# Altium PCB PCB2_DEMO_BOARD.PcbDoc (part 2 of 2)
Units mm, origin at the board's own origin, x right, y up, seen from the top; angles counter-clockwise.
Board outline 60.62 x 54.58 mm, 4 copper layers (Top Layer, GND, POWER, Bottom Layer), stack 0.778 mm thick; 141 components, 123 nets, 491 pads, 190 vias.
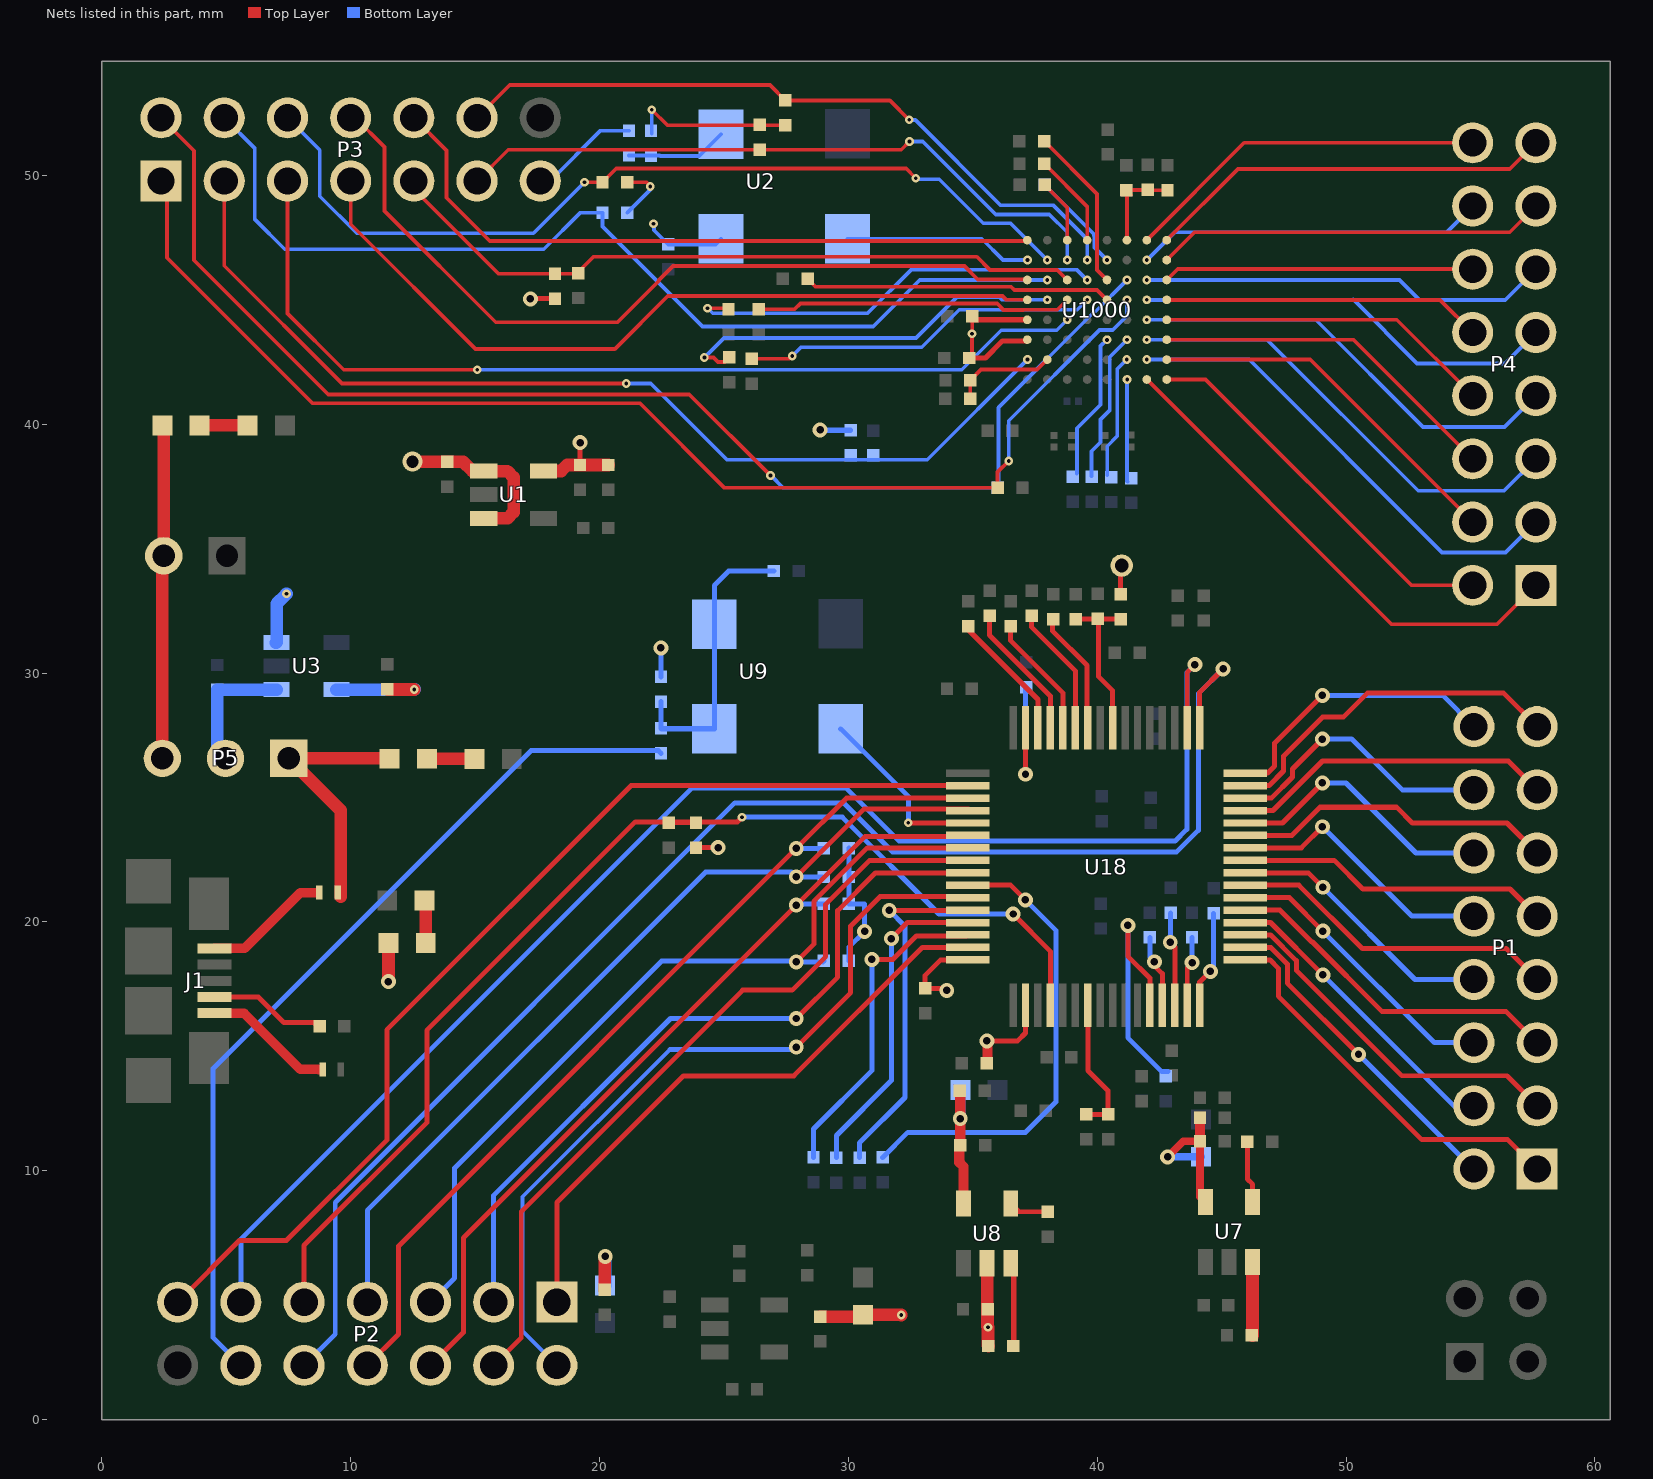
[diagram p4: the nets of this part, all layers, seen from the top]

## Via types
v1: diameter 0.6, hole 0.3, Top Layer to Bottom Layer, tented both sides, 112 vias
v2: diameter 0.35, hole 0.15, Top Layer to Bottom Layer, tented both sides, 75 vias
v3: diameter 0.8, hole 0.5, Top Layer to Bottom Layer, tented both sides, 3 vias

## Nets (pads, with @x,y where several pads share a name; then routed paths per layer and width w, separated by ;. In a path a pad name is that pad's centre, name@x,y a point inside that pad or via, vN(x,y) a via of type N, cw(c..) or ccw(c..) an arc to the next point about the centre after c; other vN are vias at no path point) (continued)
NetC23_1: C23.1 C24.1 L3.1 U7.5 | length 6.4
  Top Layer w0.305: v1(42.829,10.56) 43.457,11.188 C23.1@44.127,11.188 44.127,10.244 44.127,8.957 U7.5@44.346,8.738
  Top Layer w0.406: C23.1@44.127,11.188 C24.1@44.127,12.121
  Bottom Layer w0.305: v1(42.829,10.56) 44.171,10.56 L3.1@44.174,10.562
NetC27_1: C27.1 U7.4 | length 2.5
  Top Layer w0.2: C27.1@46.03,11.167 46.03,10.225 46.03,9.67 46.246,9.454 U7.4@46.246,8.738
NetC29_1: C29.1 C30.1 L4.1 U8.5 | length 5.8
  Top Layer w0.406: C29.1@34.476,13.216 34.495,13.198 v1(34.495,12.095) C30.1@34.495,11.026 34.452,10.983 34.452,10.341 34.622,10.171 U8.5@34.622,8.683
  Bottom Layer w0.406: v1(34.495,12.095) 34.495,13.247 L4.1@34.496,13.248
NetC32_1: C32.1 R1002.2 R1003.2 U9.1 U9.4 | length 11.6
  Bottom Layer w0.203: R1002.2@22.468,28.849 R1003.2@22.468,27.773 22.481,27.76 U9.4@24.61,27.76 U9.1@24.61,31.96 24.61,33.518 25.192,34.1 C32.1@27.004,34.1
NetC33_1: C33.1 U8.4 | length 1.6
  Top Layer w0.2: U8.4@36.53,8.691 U8.4@36.522,8.683 36.854,8.351 C33.1@38.006,8.351 38.014,8.343 C33.1@38.017,8.343
NetC34_2: C34.2 U1000.H6 | length 2.6
  Top Layer w0.15: C34.2@37.882,49.622 38.792,48.712 U1000.H6@38.792,47.395
NetC35_2: C35.2 C36.2 R30.2 U1000.H3 | length 3.9
  Top Layer w0.15: U1000.H3@41.192,47.395 C35.2@41.192,49.406 ; C35.2@41.361,49.218 C35.2@41.173,49.406 42.012,49.406 42.019,49.399 R30.2@42.822,49.399
NetC37_2: C37.2 C38.2 U1000.B7 | length 4.2
  Top Layer w0.15: C37.2@34.896,41.024 34.9,41.028 C38.2@34.9,41.768 35.327,42.195 37.592,42.195 U1000.B7@37.992,42.595
NetC39_2: C39.2 U1000.H5 | length 3.8
  Top Layer w0.15: C39.2@37.876,50.467 39.592,48.751 U1000.H5@39.592,47.395
NetC76_2: C76.2 U18.64 | length 3.9
  Top Layer w0.2: U18.64@44.116,16.648 44.116,17.587 v1(44.543,18.014)
  Bottom Layer w0.2: v1(44.543,18.014) 44.675,18.145 C76.2@44.675,20.345
NetC77_2: C77.2 C78.2 R84.2 U18.24 | length 6.3
  Top Layer w0.2: C77.2@39.13,32.164 C78.2@40.01,32.164 ; C78.2@40.023,32.178 R84.2@40.918,32.178 ; C78.2@40.041,32.088 40.041,29.864 40.616,29.289 U18.24@40.616,27.798
NetC79_2: C79.2 U18.26 | length 5.1
  Top Layer w0.2: C79.2@38.208,32.306 38.208,31.685 39.584,30.309 39.584,27.83 U18.26@39.616,27.798
NetC80_2: C80.2 U18.30 | length 5.4
  Top Layer w0.2: C80.2@34.842,32.033 34.842,31.709 37.616,28.935 U18.30@37.616,27.798
NetC81_2: C81.2 C82.2 U18.55 | length 5.6
  Top Layer w0.2: C82.2@39.549,12.265 40.43,12.265 40.43,13.218 39.626,14.023 39.626,16.639 U18.55@39.616,16.648
NetC83_2: C83.2 U18.28 | length 4.7
  Top Layer w0.2: 36.518,31.633 36.518,31.303 38.616,29.204 U18.28@38.616,27.798
NetD1_2: D1.2 R20.2 | length 1.7
  Top Layer w0.508: R20.2@12.968,20.851 13.016,20.803 D1.2@13.016,19.146
NetD2_2: D2.2 R22.2 | length 1.9
  Top Layer w0.508: D2.2@13.059,26.555 14.955,26.555 R22.2@14.972,26.539
NetD3_1: D3.1 P5.3 P6.2 | length 13.4
  Top Layer w0.508: P5.3@2.429,26.569 P6.2@2.429,34.711 ; D3.1@2.431,39.949 2.487,39.894 P6.2@2.487,34.711
NetD3_2: D3.2 R27.2 | length 1.9
  Top Layer w0.508: D3.2@3.931,39.949 5.85,39.949 R27.2@5.859,39.94
NetJ1_1: J1.1 U10.2 | length 5
  Top Layer w0.381: J1.1@4.525,18.93 5.733,18.93 7.98,21.178 8.607,21.178
NetJ1_4: J1.4 R28.2 | length 4.7
  Top Layer w0.2: J1.4@4.525,16.98 6.287,16.98 7.314,15.953 8.513,15.953 R28.2@8.741,15.725
NetJ1_5: J1.5 U12.2 | length 5.3
  Top Layer w0.2: 8.713,14.065 U12.2@8.869,14.065
  Top Layer w0.381: J1.5@4.525,16.33 5.715,16.33 7.971,14.074 8.703,14.074 8.713,14.065
NetP1_1: P1.1 U18.1 | length 15.9
  Top Layer w0.2: U18.1@45.941,18.473 46.94,18.473 47.279,18.135 47.279,17.016 53.045,11.249 56.493,11.249 P1.1@57.675,10.067
NetP1_2: P1.2 U18.2 | length 13.3
  Top Layer w0.2: U18.2@45.941,18.973 46.972,18.973 47.64,18.305 47.64,17.535 v1(50.497,14.678)
  Bottom Layer w0.2: v1(50.497,14.678) 55.107,10.067 P1.2@55.135,10.067
NetP1_3: P1.3 U18.3 | length 14.8
  Top Layer w0.2: U18.3@45.941,19.473 46.967,19.473 48.001,18.439 48.001,18.054 52.239,13.816 56.466,13.816 P1.3@57.675,12.607
NetP1_4: P1.4 U18.4 | length 12.2
  Top Layer w0.2: U18.4@45.941,19.973 46.962,19.973 v1(49.066,17.869)
  Bottom Layer w0.2: v1(49.066,17.869) 54.328,12.607 P1.4@55.135,12.607
NetP1_5: P1.5 U18.5 | length 13.9
  Top Layer w0.2: U18.5@45.941,20.473 47.342,20.473 48.625,19.19 48.65,19.19 51.435,16.406 56.416,16.406 P1.5@57.675,15.147
NetP1_6: P1.6 U18.6 | length 11.6
  Top Layer w0.2: U18.6@45.941,20.973 47.723,20.973 v1(49.066,19.629)
  Bottom Layer w0.2: v1(49.066,19.629) 53.549,15.147 P1.6@55.135,15.147
NetP1_7: P1.7 U18.7 | length 13.3
  Top Layer w0.2: U18.7@45.941,21.473 48.103,21.473 50.648,18.929 56.434,18.929 P1.7@57.675,17.687
NetP1_8: P1.8 U18.8 | length 11
  Top Layer w0.2: U18.8@45.941,21.973 48.483,21.973 v1(49.066,21.39)
  Bottom Layer w0.2: v1(49.066,21.39) 52.769,17.687 P1.8@55.135,17.687
NetP1_9: P1.9 U18.9 | length 12.7
  Top Layer w0.2: U18.9@45.941,22.473 49.519,22.473 50.673,21.319 56.583,21.319 P1.9@57.675,20.227
NetP1_10: P1.10 U18.10 | length 11.1
  Top Layer w0.2: U18.10@45.996,23.029 U18.10@45.941,22.973 48.199,22.973 v1(49.049,23.823)
  Bottom Layer w0.2: v1(49.049,23.823) 52.645,20.227 P1.10@55.135,20.227
NetP1_11: P1.11 U18.11 | length 13
  Top Layer w0.203: U18.11@45.941,23.473 47.819,23.473 48.96,24.614 48.968,24.605 52.031,24.605 52.662,23.975 56.468,23.975 P1.11@57.675,22.767
NetP1_12: P1.12 U18.12 | length 11
  Top Layer w0.203: U18.12@45.941,23.973 47.439,23.973 v1(49.049,25.584)
  Bottom Layer w0.203: v1(49.049,25.584) 49.991,25.584 52.807,22.767 P1.12@55.135,22.767
NetP1_13: P1.13 U18.13 | length 13
  Top Layer w0.203: U18.13@45.941,24.473 47.058,24.473 49.049,26.464 56.518,26.464 P1.13@57.675,25.307
NetP1_14: P1.14 U18.14 | length 11.2
  Top Layer w0.203: U18.14@45.941,24.973 46.997,24.973 47.846,25.823 47.846,26.141 v1(49.049,27.344)
  Bottom Layer w0.203: v1(49.049,27.344) 50.222,27.344 52.259,25.307 P1.14@55.135,25.307
NetP1_15: P1.15 U18.15 | length 14.2
  Top Layer w0.203: U18.15@45.941,25.473 46.898,25.473 47.485,26.06 47.485,26.66 49.049,28.225 49.886,28.225 50.864,29.203 56.319,29.203 P1.15@57.675,27.847
NetP1_16: P1.16 U18.16 | length 11.6
  Top Layer w0.2: U18.16@45.941,25.973 46.84,25.973 47.124,26.257 47.124,27.18 v1(49.049,29.105)
  Bottom Layer w0.2: v1(49.049,29.105) 53.877,29.105 P1.16@55.135,27.847
NetP2_1: P2.1 U18.47 | length 24.9
  Top Layer w0.2: P2.1@18.286,4.718 18.286,8.726 23.371,13.811 27.805,13.811 32.967,18.973 U18.47@34.885,18.973
NetP2_2: P2.2 U18.43 | length 31.9
  Top Layer w0.2: v1(27.904,14.964) 30.092,17.152 30.092,19.833 31.272,21.013 34.845,21.013 U18.43@34.885,20.973
  Bottom Layer w0.152: P2.2@18.286,2.178 16.901,3.563 16.901,8.953 22.824,14.876
  Bottom Layer w0.2: 22.824,14.876 27.815,14.876 v1(27.904,14.964)
NetP2_3: P2.3 U18.41 | length 30.4
  Top Layer w0.2: v1(27.904,16.117) 29.567,17.78 29.567,20.452 31.088,21.973 U18.41@34.885,21.973
  Bottom Layer w0.2: P2.3@15.746,4.718 15.746,9.014 22.849,16.117 v1(27.904,16.117)
NetP2_4: P2.4 U18.40 | length 31.7
  Top Layer w0.2: P2.4@15.746,2.178 16.853,3.285 16.853,8.357 25.752,17.256 27.738,17.256 29.084,18.602 29.084,20.703 30.855,22.473 U18.40@34.885,22.473
NetP2_5: P2.5 R79.1 U18.39 | length 33.9
  Top Layer w0.2: v1(27.904,18.395) 28.611,19.102 28.611,20.827 30.757,22.973 U18.39@34.885,22.973
  Bottom Layer w0.2: P2.5@13.206,4.718 14.179,5.691 14.179,10.111 22.495,18.427 v1@27.871,18.427 ; v1(27.904,18.395) 28.982,18.395 R79.1@29.017,18.43
NetP2_6: P2.6 R81.2 U18.38 | length 33.8
  Top Layer w0.2: P2.6@13.206,2.178 14.532,3.505 14.532,7.302 v1(27.904,20.674) 30.657,23.427 34.839,23.427 U18.38@34.885,23.473
  Bottom Layer w0.2: v1@27.953,20.723 R81.2@29.017,20.723
NetP2_7: P2.7 R82.1 U18.36 | length 35.9
  Top Layer w0.2: v1(27.904,21.813) 30.618,24.527 34.832,24.527 U18.36@34.885,24.473
  Bottom Layer w0.2: P2.7@10.666,4.718 10.666,8.406 24.262,22.002 27.715,22.002 v1(27.904,21.813) ; v1@27.914,21.803 R82.1@29.017,21.803
NetP2_8: P2.8 R83.1 U18.35 | length 36.8
  Top Layer w0.2: P2.8@10.666,2.178 11.924,3.436 11.924,6.972 v1(27.904,22.952) 29.925,24.973 U18.35@34.885,24.973
  Bottom Layer w0.2: v1(27.904,22.952) R83.1@29.002,22.952
NetP2_9: P2.9 R78.1 R80.2 U18.52 | length 47.1
  Top Layer w0.2: P2.9@8.126,4.718 8.126,6.999 13.058,11.931 13.058,15.644 21.436,24.022 25.539,24.022 v2(25.723,24.205) ; R80.2@22.786,23.983 R78.1@23.874,23.983 ; v1(36.618,20.317) 38.116,18.819 U18.52@38.116,16.648
  Bottom Layer w0.2: v2(25.723,24.205) 29.753,24.205 33.642,20.317 v1(36.618,20.317)
NetP2_10: P2.10 U18.17 | length 59.3
  Top Layer w0.2: U18.17@44.116,27.798 44.116,29.224 v1(45.055,30.163)
  Bottom Layer w0.2: P2.10@8.126,2.178 9.378,3.431 9.378,8.725 25.439,24.786 29.802,24.786 31.774,22.814 43.192,22.814 44.06,23.681 44.06,29.168 v1(45.055,30.163) v1@44.98,30.163
NetP2_11: P2.11 U18.18 | length 58.6
  Top Layer w0.2: U18.18@43.616,27.798 43.616,30.03 v1(43.92,30.334)
  Bottom Layer w0.2: P2.11@5.586,4.718 5.586,7.248 23.723,25.385 29.894,25.385 32.036,23.243 43.126,23.243 43.6,23.716 43.6,30.014 v1(43.92,30.334)
NetP2_12: P2.12 R1003.1 | length 35.7
  Bottom Layer w0.2: P2.12@5.586,2.178 4.473,3.291 4.473,14.108 17.243,26.878 22.363,26.878 R1003.1@22.468,26.773
NetP2_13: P2.13 U18.34 | length 43
  Top Layer w0.2: P2.13@3.046,4.718 5.521,7.194 7.416,7.194 11.449,11.227 11.449,15.66 21.262,25.473 U18.34@34.791,25.473 U18.34@34.885,25.473
NetP3_1: P3.1 R10.1 U1000.E3 | length 50.4
  Top Layer w0.15: P3.1@2.377,49.772 2.618,49.531 2.618,46.685 8.463,40.84 21.625,40.84 25.024,37.441 R10.1@35.995,37.441 35.995,38.077 v2(36.441,38.523)
  Bottom Layer w0.15: v2(36.441,38.523) 36.441,40.135 40.092,43.786 40.625,43.786 41.192,44.354 v2(41.192,44.995)
NetP3_2: P3.2 R11.1 U1000.F3 | length 52.9
  Top Layer w0.15: P3.2@2.377,52.312 3.704,50.986 3.704,46.588 9.096,41.196 23.607,41.196 v2(26.866,37.936) ; U1000.F3@41.192,45.795 v2(41.193,45.796)
  Bottom Layer w0.15: v2(26.866,37.936) 26.887,37.936 27.383,37.441 R11.1@35.995,37.441 36.026,37.472 36.026,40.665 39.901,44.539 39.936,44.539 v2(41.193,45.796)
NetP3_3: P3.3 R4.1 R8.2 U1000.B8 | length 40.6
  Top Layer w0.15: P3.3@4.917,49.772 4.917,46.364 9.644,41.637 v2(21.072,41.637)
  Bottom Layer w0.15: v2(21.072,41.637) 22.054,41.637 25.122,38.569 33.166,38.569 v2(37.192,42.595)
NetP3_4: P3.4 R3.2 U1000.F7 | length 40.5
  Bottom Layer w0.15: P3.4@4.917,52.312 6.148,51.081 6.148,48.225 7.347,47.027 17.761,47.027 19.234,48.5 R3.2@20.117,48.5 20.117,47.941 24.131,43.928 30.996,43.928 32.864,45.795 v2(37.992,45.795)
NetP3_5: P3.5 U1000.D6 | length 38.4
  Top Layer w0.15: P3.5@7.457,49.772 7.457,44.449 9.72,42.187 v2(15.082,42.187)
  Bottom Layer w0.15: v2(15.082,42.187) 34.555,42.187 36.142,43.774 38.371,43.774 v2(38.792,44.195)
NetP3_6: P3.6 R12.2 U1000.G7 | length 36.2
  Top Layer w0.15: v2(19.394,49.722) 19.39,49.717 R12.2@20.118,49.717 20.672,50.272 32.321,50.272 v2(32.709,49.884)
  Bottom Layer w0.15: P3.6@7.457,52.312 8.758,51.012 8.758,49.158 10.248,47.668 17.34,47.668 v2(19.394,49.722) ; v2(32.709,49.884) 32.754,49.839 33.654,49.839 35.419,48.073 36.514,48.073 37.986,46.601 v2(37.992,46.601)
NetP3_7: P3.7 U1000.E8 | length 32
  Top Layer w0.15: P3.7@9.997,49.772 9.997,48.037 15.013,43.022 20.615,43.022 22.743,45.15 36.197,45.15 36.352,44.995 U1000.E8@37.192,44.995
NetP3_8: P3.8 U1000.F8 | length 33.3
  Top Layer w0.15: P3.8@9.997,52.312 10.185,52.312 11.358,51.139 11.358,48.567 15.828,44.097 20.716,44.097 ; 22.402,45.783 22.39,45.795 22.949,46.354 34.664,46.354 35.201,45.817 37.17,45.817 U1000.F8@37.192,45.795
  Top Layer w0.152: 20.716,44.097 22.402,45.783
NetP3_9: P3.9 R5.1 R9.2 U1000.F6 | length 28.7
  Top Layer w0.15: P3.9@12.537,49.772 12.537,49.442 15.936,46.043 R5.1@18.21,46.043 19.114,46.043 R9.2@19.14,46.07 19.14,46.109 19.757,46.726 35.162,46.726 35.691,46.197 37.025,46.197 37.026,46.195 38.392,46.195 U1000.F6@38.792,45.795
NetP3_10: P3.10 U1000.H8 | length 27.8
  Top Layer w0.15: P3.10@12.537,52.312 13.849,51 13.849,49.099 15.591,47.357 U1000.H8@37.154,47.357
  Top Layer w0.152: U1000.H8@37.154,47.357 U1000.H8@37.192,47.395
NetP3_11: P3.11 R13.1 U1000.G6 | length 27.5
  Top Layer w0.15: P3.11@15.077,49.274 P3.11@15.077,49.772 16.333,51.027 R13.1@26.441,51.027 32.122,51.027 v2(32.451,51.356) ; U1000.G6@38.792,46.595 v2(38.792,46.601)
  Bottom Layer w0.15: v2(32.451,51.356) 32.989,51.356 35.916,48.428 38.073,48.428 38.792,47.709 v2(38.792,46.601)
NetP3_12: P3.12 R14.1 U1000.G5 | length 28.5
  Top Layer w0.15: P3.12@15.077,52.312 16.393,53.628 26.845,53.628 R14.1@27.465,53.008 31.666,53.008 v2(32.439,52.234)
  Bottom Layer w0.15: v2(32.439,52.234) 32.454,52.22 32.691,52.22 36.118,48.792 38.239,48.792 39.592,47.439 v2(39.592,46.595)
NetP3_13: P3.13 R31.1 | length 4.4
  Bottom Layer w0.15: P3.13@17.617,49.772 18.019,49.772 20.042,51.795 R31.1@21.182,51.795
NetP4_1: P4.1 U1000.A2 | length 20.4
  Top Layer w0.152: U1000.A2@41.992,41.795 51.826,31.961 56.061,31.961 P4.1@57.625,33.525
NetP4_2: P4.2 U1000.A1 | length 15.7
  Top Layer w0.152: U1000.A1@42.792,41.795 44.353,41.795 52.622,33.525 P4.2@55.085,33.525
NetP4_3: P4.3 U1000.B2 | length 19.3
  Bottom Layer w0.152: v2(41.992,42.595) 46.108,42.595 53.856,34.847 56.407,34.847 P4.3@57.625,36.065
NetP4_4: P4.4 U1000.B1 | length 15
  Top Layer w0.152: U1000.B1@42.792,42.595 48.556,42.595 P4.4@55.085,36.065
NetP4_5: P4.5 U1000.C2 | length 18.7
  Bottom Layer w0.152: v2(41.992,43.395) 46.827,43.395 52.896,37.325 56.345,37.325 P4.5@57.625,38.605
NetP4_6: P4.6 U1000.C1 | length 14.3
  Top Layer w0.152: U1000.C1@42.792,43.395 50.296,43.395 P4.6@55.085,38.605
NetP4_7: P4.7 U1000.D2 | length 17.9
  Bottom Layer w0.152: v2(41.993,44.195) 48.777,44.195 53.09,39.882 56.362,39.882 P4.7@57.625,41.145
NetP4_8: P4.8 U1000.D1 | length 13.6
  Top Layer w0.152: U1000.D1@42.792,44.195 52.036,44.195 P4.8@55.085,41.145
NetP4_9: P4.9 U1000.E2 | length 17.2
  Bottom Layer w0.152: v2(41.992,44.995) 50.281,44.995 50.29,45.004 52.854,42.441 56.381,42.441 P4.9@57.625,43.685
NetP4_10: P4.10 U1000.E1 | length 12.8
  Top Layer w0.152: U1000.E1@42.792,44.995 53.776,44.995 P4.10@55.085,43.685
NetP4_11: P4.11 U1000.F2 | length 16.5
  Bottom Layer w0.152: v2(41.992,45.795) 52.147,45.795 52.947,44.995 56.395,44.995 P4.11@57.625,46.225
NetP4_12: P4.12 U1000.F1 | length 12.5
  Top Layer w0.152: U1000.F1@42.792,45.795 43.234,46.237 55.073,46.237 P4.12@55.085,46.225
NetP4_13: P4.13 U1000.G1 | length 15.7
  Top Layer w0.152: U1000.G1@42.792,46.595 43.911,47.714 56.574,47.714 P4.13@57.625,48.765
NetP4_14: P4.14 U1000.G2 | length 14
  Bottom Layer w0.152: v2(41.993,46.596) 43.105,47.708 54.028,47.708 P4.14@55.085,48.765
NetP4_15: P4.15 U1000.H1 | length 16.5
  Top Layer w0.152: U1000.H1@42.792,47.395 45.651,50.254 56.574,50.254 P4.15@57.625,51.305
NetP4_16: P4.16 U1000.H2 | length 14.7
  Top Layer w0.152: U1000.H2@41.992,47.395 45.903,51.305 P4.16@55.085,51.305
NetR1_2: R1.2 U1000.A3 | length 4.1
  Top Layer w0.15: U1000.A3@41.192,41.795 v2(41.206,41.795)
  Bottom Layer w0.15: v2(41.206,41.795) 41.196,41.785 41.196,37.716 R1.2@41.222,37.69
NetR2_2: R2.2 U1000.C4 | length 5.9
  Top Layer w0.15: v2(40.392,43.386) U1000.C4@40.392,43.395
  Bottom Layer w0.15: R2.2@39.175,38.013 39.187,38.025 39.187,39.834 40.133,40.78 40.133,43.139 40.381,43.386 v2(40.392,43.386)
NetR6_2: R6.2 U1000.B3 | length 5
  Top Layer w0.15: v2(41.188,42.599) U1000.B3@41.192,42.595
  Bottom Layer w0.15: R6.2@40.399,37.949 40.399,39.116 40.806,39.523 40.806,42.217 v2(41.188,42.599)
NetR7_2: R7.2 U1000.C3 | length 6.1
  Bottom Layer w0.15: R7.2@39.771,37.92 39.771,38.912 40.133,39.274 40.133,40.192 40.506,40.565 40.506,42.708 v2(41.193,43.394)
NetR15_2: R15.2 U18.46 | length 13.2
  Top Layer w0.2: v1(30.941,18.489) 31.788,18.489 32.729,19.43 34.748,19.43 U18.46@34.791,19.473
  Bottom Layer w0.2: R15.2@28.596,10.533 28.596,11.675 30.941,14.02 v1(30.941,18.489)
NetR16_2: R16.2 U18.45 | length 13.1
  Top Layer w0.2: v1(31.725,19.329) 32.369,19.973 U18.45@34.791,19.973
  Bottom Layer w0.2: R16.2@29.519,10.525 29.519,11.417 31.725,13.623 v1(31.725,19.329)
NetR17_1: R17.1 U7.3 | length 3
  Top Layer w0.508: R17.1@46.238,3.38 U7.3@46.238,6.331
NetR18_2: R18.2 U18.44 | length 14.1
  Top Layer w0.2: v1(31.64,20.463) 34.781,20.463 U18.44@34.791,20.473
  Bottom Layer w0.2: R18.2@30.448,10.525 30.448,11.119 32.275,12.945 32.275,19.829 v1(31.64,20.463)
NetR19_2: R19.2 U18.42 | length 19.1
  Top Layer w0.2: U18.42@34.791,21.473 36.522,21.473 v1(37.109,20.886)
  Bottom Layer w0.2: R19.2@31.375,10.533 32.386,11.545 37.119,11.545 38.335,12.761 38.335,19.66 v1(37.109,20.886)
NetR21_2: R21.2 U8.3 | length 3.4
  Top Layer w0.203: U8.3@36.522,6.283 36.644,6.162 36.644,2.972 R21.2@36.628,2.956
NetR23_2: R23.2 U1000.F5 | length 17.1
  Top Layer w0.15: v2(24.34,44.663) 25.141,44.663 R23.2@25.18,44.702
  Bottom Layer w0.15: v2(24.34,44.663) 24.548,44.455 30.765,44.455 32.511,46.201 39.186,46.201 v2(39.592,45.795)
NetR24_2: R24.2 U1000.E7 | length 16
  Top Layer w0.15: v2(24.212,42.681) 24.58,42.681 24.762,42.499 25.019,42.499 R24.2@25.211,42.691
  Bottom Layer w0.15: v2(24.212,42.681) 24.996,43.466 32.711,43.466 34.359,45.113 36.07,45.113 36.188,44.995 v2(37.992,44.995)
NetR25_2: R25.2 U1000.E6 | length 12.8
  Top Layer w0.15: R25.2@26.405,44.615 27.839,44.615 28.07,44.846 35.979,44.846 36.236,44.59 37.021,44.59 37.026,44.595 38.392,44.595 U1000.E6@38.792,44.995
NetR26_2: R26.2 U1000.E5 | length 14.5
  Top Layer w0.15: R26.2@26.118,42.629 27.632,42.629 v2(27.739,42.737)
  Bottom Layer w0.15: v2(27.739,42.737) 28.092,43.089 32.945,43.089 34.451,44.596 37.826,44.596 ; 37.826,44.595 39.192,44.595 v2(39.592,44.995)
NetR29_2: R29.2 R31.2 U2.1 | length 4.1
  Bottom Layer w0.15: R31.2@21.182,50.795 22.414,50.795 22.436,50.773 24.005,50.773 U2.1@24.883,51.651
NetR32_1: R32.1 U1000.E4 | length 12.3
  Top Layer w0.15: R32.1@28.387,45.819 28.542,45.664 28.542,45.661 28.686,45.517 36.546,45.517 36.668,45.395 39.992,45.395 U1000.E4@40.392,44.995
NetR33_2: R33.2 U1000.G4 | length 4.1
  Bottom Layer w0.15: R33.2@37.882,49.622 39.869,47.635 39.869,47.586 39.892,47.563 39.892,47.095 v2(40.392,46.595)
NetR34_2: R34.2 U1000.F4 | length 6.6
  Top Layer w0.15: R34.2@37.868,51.377 39.992,49.252 39.992,46.195 U1000.F4@40.392,45.795
NetR74_2: R74.2 U18.62 | length 3.8
  Top Layer w0.2: v1(42.934,19.18) 43.116,18.998 U18.62@43.116,16.648
  Bottom Layer w0.2: v1(42.934,19.18) 42.934,20.344 R74.2@42.953,20.363
NetR75_2: R75.2 U18.60 | length 10.3
  Top Layer w0.2: v1(41.228,19.855) 41.228,18.625 42.116,17.737 U18.60@42.116,16.648
  Bottom Layer w0.2: v1(41.228,19.855) 41.228,15.343 42.592,13.98 R75.2@42.84,13.98
NetR76_2: R76.2 U18.63 | length 2.8
  Top Layer w0.2: U18.63@43.616,16.648 43.616,18.169 v1(43.809,18.362)
  Bottom Layer w0.2: R76.2@43.807,19.375 43.809,19.373 v1(43.809,18.362)
NetR77_2: R77.2 U18.61 | length 2.9
  Top Layer w0.2: v1(42.294,18.396) 42.294,18.241 42.616,17.919 U18.61@42.616,16.648
  Bottom Layer w0.2: R77.2@42.111,19.375 42.111,18.579 v1(42.294,18.396)
NetR84_1: R84.1 TP14.1 | length 1.1
  Top Layer w0.2: R84.1@40.937,33.159 TP14.1@40.937,34.274
NetR85_2: R85.2 U18.29 | length 5.5
  Top Layer w0.2: R85.2@35.672,32.306 35.672,31.522 38.116,29.078 U18.29@38.116,27.798
NetR86_1: R86.1 U18.31 | length 5.4
  Top Layer w0.2: v1(37.116,25.931) U18.31@37.116,27.798
  Bottom Layer w0.2: v1(37.116,25.931) R86.1@37.116,29.415
NetR87_2: R87.2 U18.27 | length 5.2
  Top Layer w0.2: R87.2@37.363,32.306 37.363,31.841 39.116,30.087 U18.27@39.116,27.798
NetU2_3: U2.3 U1000.G8 | length 7.6
  Bottom Layer w0.15: U2.3@29.963,47.451 35.355,47.451 36.21,46.595 37.186,46.595 v2(37.192,46.601)
NetU9_3: U9.3 U18.37 | length 7.3
  Top Layer w0.2: v2(32.408,23.986) 32.408,23.973 U18.37@34.791,23.973 U18.37@34.788,23.977
  Bottom Layer w0.2: U9.3@29.69,27.76 32.408,25.042 v2(32.408,23.986)
VCC_5: C42.2 P5.2 U3.1 U3.3 | length 7.4
  Bottom Layer w0.508: P5.2@4.969,26.569 4.631,26.907 C42.2@4.631,29.322 4.643,29.334 U3.1@7.024,29.334 ; U3.3@7,31.21 U3.3@7.024,31.234 7.024,32.782 7.395,33.153 7.395,33.164 v2(7.418,33.187)
VCC_33: C4.1 C5.2 C12.2 C13.2 C14.1 C72.2 C73.2 R3.1 R4.2 R5.2 R12.1 R13.2 R14.2 R29.1 R78.2 R79.2 R81.1 R82.2 R83.2 R1002.1 U1.5 U2.4 U18.48 U18.50 U1000.C8 U1000.D8 | length 39.1
  Top Layer w0.15: R12.1@21.12,49.715 R12.1@21.118,49.717 21.89,49.717 22.031,49.576 v2(22.031,49.552) ; v2(22.097,52.637) 22.726,52.008 R14.2@27.465,52.008 ; C13.2@34.853,42.659 34.964,42.77 v2(34.964,43.638) 34.971,43.645 34.971,44.195 C12.2@34.971,44.334
  Top Layer w0.203: v1(17.221,45.035) 17.229,45.043 R5.2@18.21,45.043 ; C5.2@19.215,38.36 v1(19.215,39.257) ; R78.2@23.874,22.983 v1(24.761,22.983) ; v1(33.95,17.25) 33.873,17.328 C73.2@33.084,17.328 33.084,17.852 33.705,18.473 U18.48@34.791,18.473 ; C13.2@34.853,42.659 35.507,42.659 36.186,43.339 37.136,43.339 U1000.C8@37.192,43.395 ; C12.2@34.914,44.195 34.971,44.195 U1000.D8@37.192,44.195 ; v1(35.567,15.22) 36.802,15.22 37.116,15.534 U18.50@37.116,16.648
  Top Layer w0.406: v1(35.567,15.22) 35.582,15.205 35.582,14.588
  Top Layer w0.508: U1.5@17.748,38.116 18.455,38.116 18.699,38.36 C5.2@19.215,38.36 C4.1@20.358,38.36
  Bottom Layer w0.15: R3.1@21.117,48.5 22.031,49.414 v2(22.031,49.552) ; R29.1@22.097,51.684 v2(22.097,52.637) ; v2(22.167,48.049) 22.188,48.027 22.188,47.795 C14.1@22.761,47.222 24.654,47.222 U2.4@24.883,47.451
  Bottom Layer w0.203: R1002.1@22.468,29.849 v1(22.468,31.009) ; v1(28.861,39.769) 28.873,39.757 R4.2@30.09,39.757 ; R79.2@30.017,18.43 30.017,18.981 30.644,19.608 30.644,20.723 R81.1@30.017,20.723 R82.2@30.017,21.803 R83.2@30.017,22.967
  other v1: 30.651,19.615
VSYS: C6.2 C17.1 C40.2 C41.1 D1.1 L1.1 U1.1 U1.3 U3.5 | length 15.4
  Top Layer w0.508: C41.1@11.474,29.346 11.485,29.335 v2(12.555,29.335) ; v1(11.515,17.597) 11.516,17.599 D1.1@11.516,19.146 ; v3(12.484,38.495) 12.492,38.487 C6.2@13.881,38.487 14.524,38.487 14.895,38.116 U1.1@15.348,38.116 15.35,38.114 16.294,38.114 16.548,37.86 16.548,36.463 16.301,36.216 U1.3@15.348,36.216 ; C17.1@20.206,5.211 20.206,6.538 v1(20.228,6.56)
  Bottom Layer w0.508: U3.5@9.424,29.334 11.462,29.334 C40.2@11.474,29.346 12.566,29.346 v2(12.555,29.335) ; L1.1@20.223,5.384 20.223,6.554 v1(20.228,6.56)
VSYS_NEG: C22.1 C31.1 L2.2 R21.1 U8.2 | length 7.2
  Top Layer w0.508: C22.1@28.87,4.139 L2.2@30.517,4.139 ; L2.2@30.59,4.212 32.11,4.212 v2(32.123,4.2) ; U8.2@35.572,6.283 35.572,3.744 v2@35.604,3.712 ; C31.1@35.604,4.425 v2@35.604,3.712 ; R21.1@35.628,2.956 35.608,2.976 v2(35.608,3.708) v2@35.604,3.712
VUSB: D2.1 P5.1 U10.1 | length 10.5
  Top Layer w0.508: U10.1@9.599,21.007 9.599,24.479 P5.1@7.509,26.569 11.545,26.569 D2.1@11.559,26.555
pads on no net: J1.2 J1.3 J1.7 P7.1 P7.2 R15.1 R16.1 R18.1 R19.1 R23.1 R24.1 R25.1 R26.1 R30.1 U2.5 U3.4 U9.5
copper on no net:
  other v1: 44.672,36.023

## Polygon pours and split planes (outlines as drawn)
GND on Top Layer "Top Layer-No Net 1" (solid, remove dead copper, pour order 17): 36.05,26.613 44.762,26.613 44.767,26.617 44.767,17.988 36.05,17.988 36.05,17.989 36.05,26.613
GND on Top Layer "Top Layer-No Net 1" (solid, remove dead copper, pour order 12): -6.429,59.217 35.226,59.217 35.226,38.563 44.449,38.585 44.165,49.498 35.226,49.498 35.226,59.217 67.992,59.217 67.992,16.774 48.193,16.774 48.193,27.375 32.7,27.375 32.685,27.391 32.685,17.7 67.992,17.7 67.992,-4.278 -6.43,-4.278
GND on Bottom Layer "Top Layer-No Net 1" (solid, remove dead copper, pour order 16): 0.628,53.979 59.192,53.979 59.223,0.9 0.635,0.9
NetC18_1 on Bottom Layer "Bottom Layer-No Net" (solid, remove dead copper, pour order 8): 20.75,6.99 44.476,6.99 45.387,6.08 45.888,5.579 45.888,1.244 45.888,1.069 45.562,0.743 23.529,0.743 20.75,3.522
GND on GND (split plane): 60.11,54.066 60.11,0.51 0.51,0.51 0.511,54.066
VSYS on POWER (split plane): 16.316,38.295 16.316,18.835 16.319,18.805 16.322,18.776 16.339,18.72 16.367,18.668 16.404,18.623 27.713,7.314 27.738,7.293 27.758,7.277 27.81,7.249 27.866,7.232 27.925,7.226 30.382,7.226 30.38,7.201 30.38,0.51 0.51,0.51 0.51,8.041 5.877,8.041 5.906,8.044 5.935,8.047 5.991,8.064 6.043,8.092 6.089,8.129 9.77,11.81 9.786,11.83 9.807,11.855 9.825,11.889 9.835,11.907 9.852,11.963 9.855,11.993 9.857,12.022 9.857,37.224 9.852,37.282 9.835,37.339 9.807,37.391 9.79,37.411 9.77,37.436 8,39.206 7.955,39.243 7.903,39.271 7.846,39.288 7.817,39.291 7.788,39.293 0.511,39.293 0.511,43.577 11.034,43.577
VSYS_NEG on POWER (split plane): 39.223,0.51 30.98,0.51 30.98,7.077 33.529,9.627 33.546,9.647 33.567,9.672 33.585,9.706 33.594,9.724 33.611,9.78 33.617,9.839 33.617,9.907 39.223,9.907
VCC_5 on POWER (split plane): 9.258,37.1 9.258,12.146 5.752,8.641 0.51,8.641 0.511,38.694 7.664,38.694
VCC_33 on POWER (split plane): 33.02,54.066 33.02,46.506 33.026,46.447 33.043,46.391 33.071,46.339 33.108,46.294 33.153,46.257 33.191,46.237 33.191,46.025 33.2,45.976 33.228,45.934 33.391,45.771 33.433,45.743 33.482,45.734 35.497,45.734 35.842,45.389 35.842,43.174 34.717,42.049 33.382,42.049 33.332,42.039 33.29,42.011 33.117,41.838 33.077,41.851 33.019,41.856 32.96,41.851 32.904,41.834 32.852,41.806 32.806,41.768 32.769,41.723 32.741,41.671 32.724,41.615 32.719,41.556 32.719,27.761 32.722,27.731 32.724,27.702 32.741,27.646 32.769,27.594 32.806,27.549 33.02,27.335 33.02,18.452 33.026,18.394 33.043,18.338 33.071,18.286 33.108,18.24 33.153,18.203 33.205,18.175 33.209,18.174 33.228,18.16 33.29,18.134 33.356,18.125 33.782,18.125 35.998,15.91 35.998,15.088 35.444,14.535 34.496,14.535 34.429,14.526 34.367,14.5 34.314,14.46 33.245,13.39 33.202,13.377 33.151,13.35 33.105,13.312 33.068,13.267 33.04,13.215 33.023,13.159 33.017,13.1 33.017,9.963 30.88,7.826 28.049,7.826 16.916,18.959 16.916,38.419 16.913,38.448 16.91,38.477 16.893,38.534 16.866,38.585 16.828,38.631 11.37,44.089 11.324,44.127 11.273,44.154 11.216,44.171 11.187,44.174 11.158,44.177 0.511,44.177 0.511,54.066
NetC18_1 on POWER (split plane): 46.675,0.51 39.736,0.51 39.736,9.967 39.745,9.974 40.761,10.99 41.988,12.218 45.3,12.218 45.366,12.226 45.428,12.252 45.481,12.293 46.675,13.487
GND on POWER (split plane): 60.11,54.066 60.11,0.51 47.275,0.51 47.275,54.066
AVDD on POWER (split plane): 39.06,41.433 39.07,41.383 39.098,41.341 39.14,41.313 39.189,41.304 40.082,41.304 40.131,41.313 40.173,41.341 40.477,41.645 45.691,41.645 45.712,41.641 46.675,41.641 46.675,14.211 45.194,12.73 41.882,12.73 41.816,12.721 41.795,12.713 39.401,12.713 38.912,13.202 38.912,15.928 39.296,16.313 43.301,16.313 43.368,16.321 43.429,16.347 43.482,16.388 43.523,16.441 43.549,16.503 43.557,16.569 43.557,27.346 43.549,27.413 43.538,27.438 43.523,27.475 43.482,27.528 42.835,28.175 42.782,28.216 42.72,28.242 42.654,28.25 38.254,28.25 38.19,28.242 37.926,28.506 37.926,32.821 42.534,37.429 42.562,37.471 42.572,37.521 42.572,39.032 42.562,39.081 42.534,39.123 42.492,39.152 42.442,39.161 38.354,39.161 38.304,39.152 38.262,39.123 37.552,38.414 36.937,38.414 36.36,38.99 36.36,40.827 37.278,41.745 37.306,41.787 37.316,41.836 37.316,43.427 37.499,43.61 39.06,43.61
AVSS on POWER (split plane): 46.675,54.066 46.675,41.9 45.736,41.9 45.716,41.904 40.424,41.904 40.374,41.895 40.332,41.866 40.028,41.562 39.319,41.562 39.319,43.739 39.309,43.789 39.281,43.831 39.239,43.859 39.189,43.869 37.446,43.869 37.396,43.859 37.354,43.831 37.095,43.572 37.067,43.53 37.057,43.48 37.057,41.89 36.139,40.972 36.111,40.93 36.101,40.88 36.101,38.937 36.111,38.887 36.139,38.845 36.791,38.193 36.833,38.165 36.883,38.155 37.606,38.155 37.656,38.165 37.698,38.193 38.407,38.902 42.313,38.902 42.313,37.575 37.705,32.967 37.677,32.925 37.667,32.875 37.667,28.452 37.677,28.403 37.705,28.361 38.007,28.059 37.998,27.994 38.007,27.928 38.033,27.866 38.073,27.813 38.126,27.772 38.188,27.747 38.254,27.738 42.547,27.738 43.045,27.24 43.045,16.825 39.19,16.825 39.124,16.816 39.062,16.791 39.009,16.75 38.474,16.215 38.434,16.162 38.408,16.101 38.399,16.034 38.399,13.096 38.408,13.029 38.434,12.968 38.474,12.915 39.113,12.276 39.167,12.235 39.228,12.209 39.295,12.2 41.088,12.2 41.088,12.042 40.399,11.353 39.466,10.42 33.617,10.42 33.617,13.038 34.602,14.022 35.55,14.022 35.616,14.031 35.678,14.057 35.731,14.097 36.435,14.801 36.476,14.854 36.501,14.916 36.51,14.982 36.51,16.016 36.501,16.082 36.476,16.144 36.435,16.197 34.069,18.563 34.016,18.603 33.954,18.629 33.888,18.638 33.62,18.638 33.62,27.459 33.617,27.489 33.614,27.518 33.597,27.574 33.587,27.592 33.569,27.626 33.532,27.671 33.318,27.885 33.318,41.556 33.313,41.615 33.3,41.655 33.435,41.79 34.771,41.79 34.82,41.8 34.862,41.828 36.063,43.029 36.091,43.071 36.101,43.12 36.101,45.442 36.091,45.492 36.063,45.534 35.642,45.955 35.6,45.983 35.551,45.993 33.536,45.993 33.45,46.079 33.45,46.237 33.487,46.257 33.532,46.294 33.569,46.339 33.597,46.391 33.614,46.447 33.62,46.506 33.62,54.066

## Other copper
GND (plane layer: these items are gaps in the copper):
  lines w0.191: 35.607,38.727 35.607,38.82
POWER (plane layer: these items are gaps in the copper):
  lines w0.254: 33.019,41.556 33.382,41.92 34.771,41.92 35.971,43.12 35.971,45.442 35.551,45.863 33.482,45.863 33.32,46.025 33.32,46.506 ; 38.254,27.994 37.796,28.452 37.796,32.875 42.442,37.521 42.442,39.032 38.354,39.032 37.606,38.284 36.883,38.284 36.231,38.937 36.231,40.88 37.187,41.836 37.187,43.48 37.446,43.739 39.189,43.739 39.189,41.433 40.082,41.433 40.424,41.775 45.716,41.775 45.712,41.771 46.968,41.771
  lines w0.508: 33.317,13.1 34.496,14.279 35.55,14.279 36.254,14.982 36.254,16.016 33.888,18.381 33.356,18.381 ; 33.357,10.163 39.556,10.163 ; 38.254,27.994 42.654,27.994 43.301,27.346 43.301,16.569 39.19,16.569 38.656,16.034 38.656,13.096 39.295,12.457 41.865,12.457 40.58,11.171 39.564,10.155 41.882,12.474 45.3,12.474 46.98,14.153 ; 39.48,0.026 39.48,10.082 39.571,10.173 ; 41.344,11.951 41.344,12.409
  lines w0.597: 0.071,43.877 11.158,43.877 16.616,38.419 16.616,18.835 27.925,7.526 30.936,7.526 ; 0.11,18.519 0.11,19.789 ; 0.118,36.942 0.118,38.994 7.788,38.994 9.558,37.224 9.558,12.022 5.877,8.341 0.213,8.341 ; 18.359,0.025 33.375,0.025 ; 33.019,41.556 33.019,27.761 33.32,27.459 33.32,18.452 ; 33.317,13.1 33.317,9.839 30.68,7.201 30.68,0.053 33.317,0.053 41.039,0.053 46.975,0.053 46.975,0.068 ; 33.32,46.506 33.32,54.48 ; 46.975,-0.053 46.975,54.651

## Silkscreen, mask and mechanical layers (free items; w line width, h text height)
Top Overlay:
  text "CH1+  CH 1-" at 47.411,51.074 h0.51
  text "BGA CONTROL" at 4.114,46.195 h0.76
  text "GND" at 6.876,34.206 h0.76
  text "CH1+  CH 1-" at 48.353,26.985 h0.51
  text "EXT" at 1.601,24.18 h0.76
  text "USB" at 5.988,24.157 h0.76
  text "CH8+  CH 8-" at 48.1,9.381 h0.51
  text "QFP CONTROL" at 7.919,7.501 h0.76
BOARD OUTLINE:
  lines w0: -0.003,0 -0.003,54.569 60.634,54.569 60.634,0 -0.003,0

## Text inside footprints (layer, text, board x,y; h text height)
P1: Top Overlay "16" at 54.54,29.822 h0.51; Top Overlay "15" at 57.573,29.671 h0.51; Top Overlay "1" at 57.838,7.76 h0.51; Top Overlay "2" at 55.231,7.875 h0.51
P2: Top Overlay "14" at 0.434,1.605 h0.51; Top Overlay "13" at 0.396,4.814 h0.51; Top Overlay "2" at 18.179,7.149 h0.51; Top Overlay "1" at 18.21,8.402 h0.51
P3: Top Overlay "14" at 19.651,53.297 h0.51; Top Overlay "13" at 19.557,50.477 h0.51; Top Overlay "2" at 1.763,47.25 h0.51; Top Overlay "1" at 1.919,45.966 h0.51
P4: Top Overlay "16" at 54.729,53.173 h0.51; Top Overlay "15" at 58.065,53.287 h0.51; Top Overlay "1" at 57.914,31.149 h0.51; Top Overlay "2" at 54.54,31.149 h0.51
P7: Top Overlay "1" at 52.73,1.826 h0.51; Top Overlay "2" at 52.751,4.775 h0.51; Top Overlay "4" at 58.826,4.366 h0.51; Top Overlay "3" at 58.826,1.826 h0.51